# Allegro board private.brd
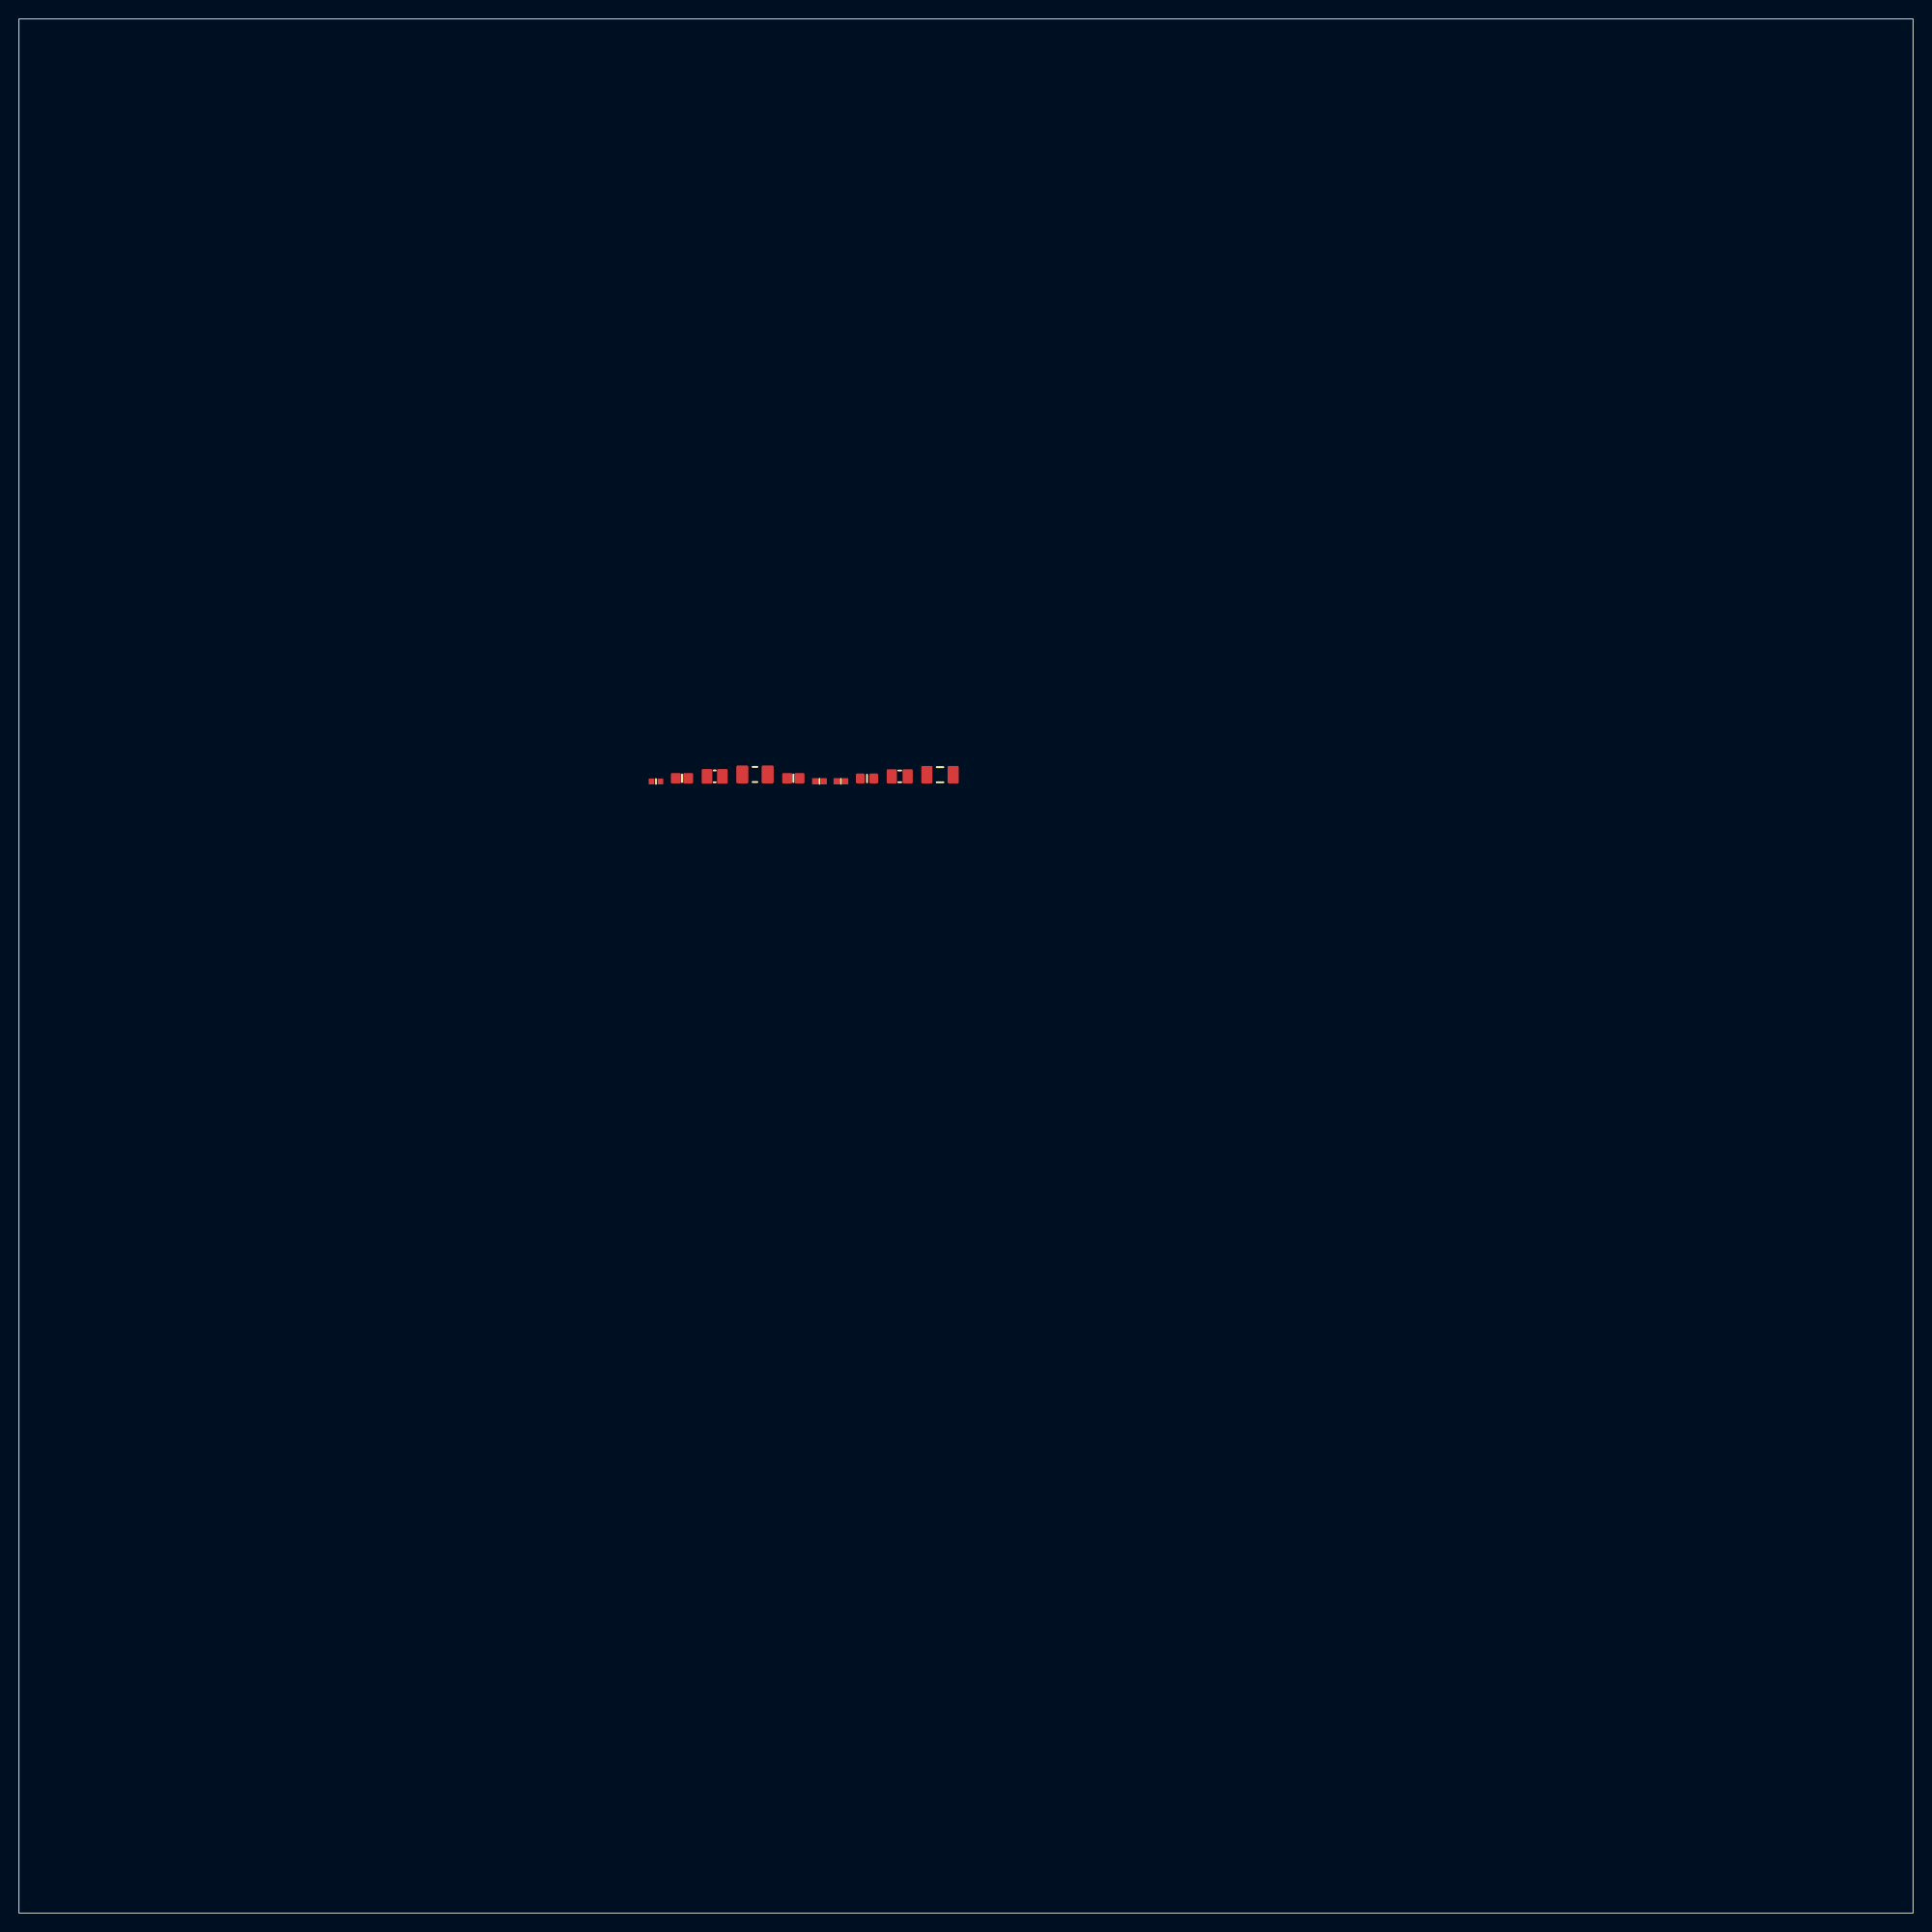
[diagram p0: board, top side]
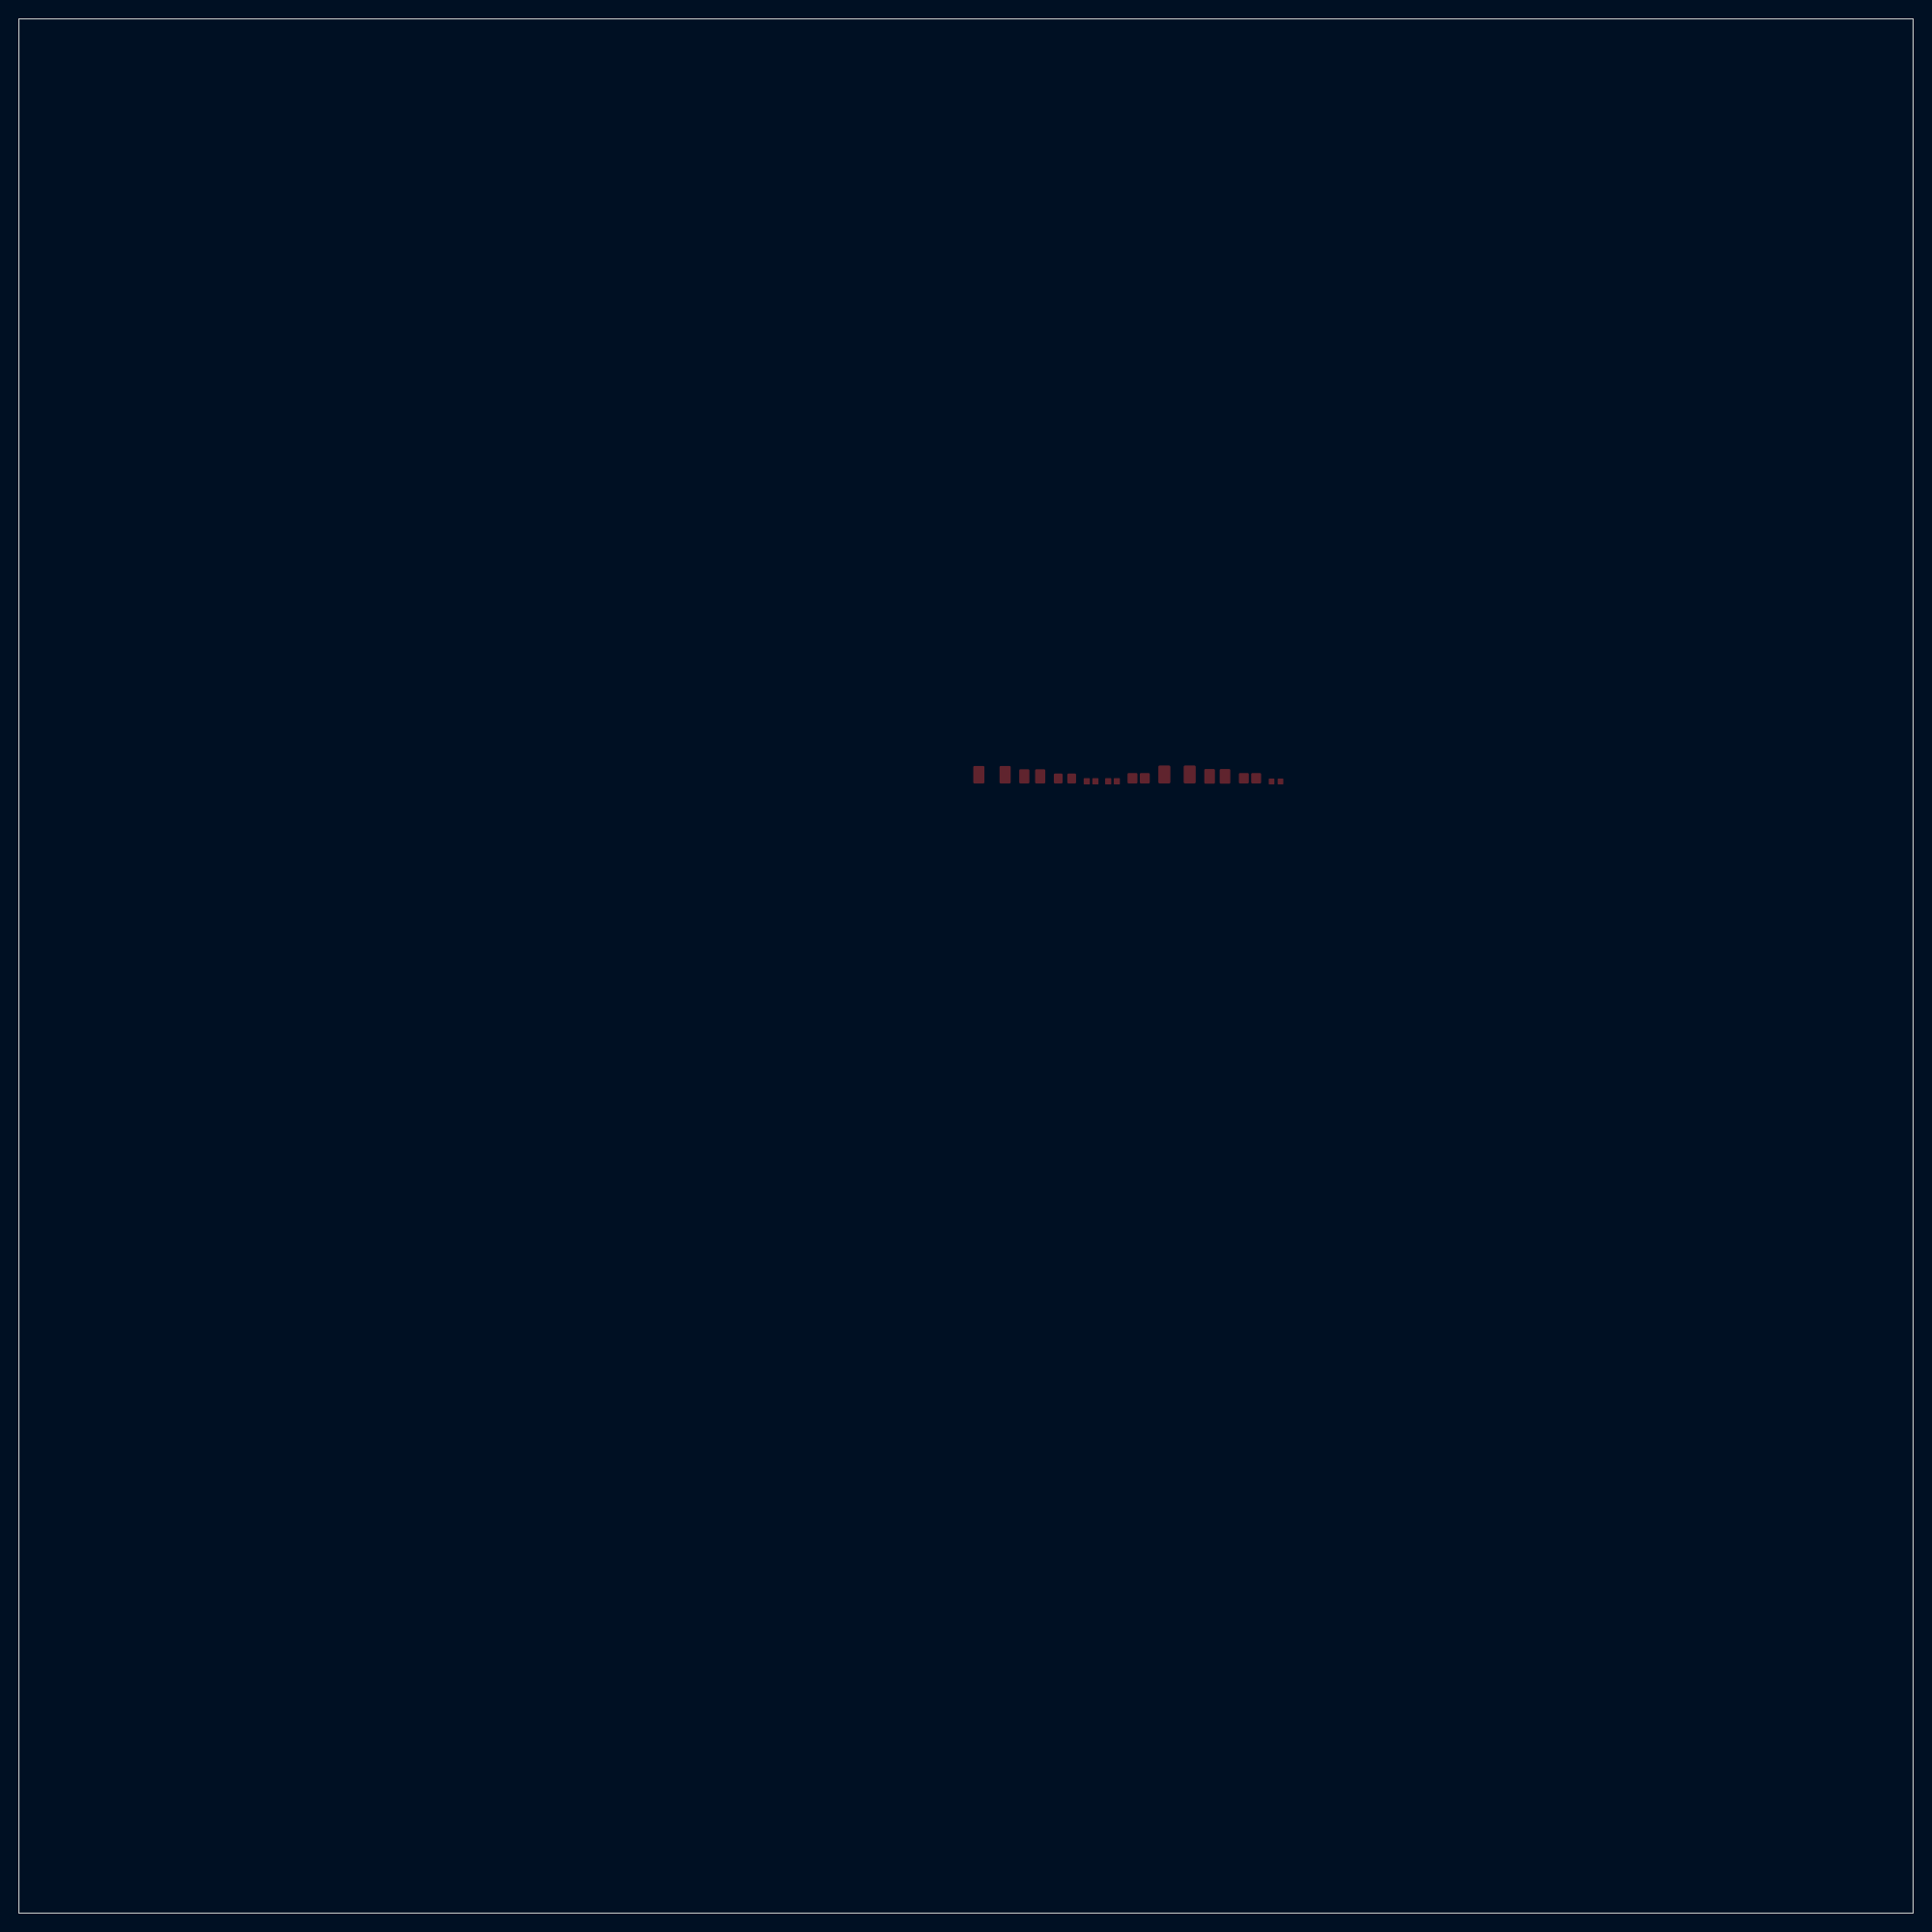
[diagram p1: board, bottom side, seen from below]

Outline 200 x 200 mm; copper layers: TOP, BOTTOM. Coordinates in mm from the lower left corner of the outline.
Outline path: rectangle 0,0 200,200

## Design rules (mm)
constraint set DEFAULT: min track width 0.127

## Placement (name value [footprint] x y rotation side)
C1  100nF,25V  [CAPC1005X70N]  67.26 119.48 0 top
C2  100nF,50V  [CAPC1608X100N]  70.01 119.82 0 top
C3  10uF,25V  [CAPC2012X140N]  73.46 120.02 0 top
C4  22uF,25V  [CAPC3216X140N]  77.72 120.22 0 top
C5  4.7uF,16V  [CAPC1608X100N]  81.77 119.82 0 top
R2  R,5%  [RESC1005X40N]  84.53 119.5 0 top
R3  0R,5%  [RESC1005X40N]  86.79 119.5 0 top
R4  0R,5%  [RESC1608X55N]  89.55 119.8 0 top
R5  0R,5%  [RESC2013X65N]  93 120.02 0 top
R6  0R,5%  [RESC3216X65N]  97.26 120.2 0 top

## Library data of the parts
C1 = CAP_100nF_25V_X5R_0402
C2 = CAP_100nF_50V_X5R_0603
C3 = CAP_10uF_25V_X5R_0805
C4 = CAP_22uF_25V_X5R_1206
C5 = CAP_4.7uF_16V_X5R_0603
R2 = RES_R_5%_0402
R3 = RES_0R_5%_0402
R4 = RES_0R_5%_0603
R5 = RES_0R_5%_0805
R6 = RES_0R_5%_1206

## Footprints (pads in the part's own frame, mm; a bottom-side part is the same pattern mirrored in y, then rotated)
CAPC1005X70N
  rrect 0.595x0.62 smd: 1(-0.472,0) 2(0.472,0)
CAPC1608X100N
  rrect 1.05x1.1 smd: 1(-0.65,0) 2(0.65,0)
CAPC2012X140N
  rrect 1.125x1.55 smd: 1(-0.812,0) 2(0.812,0)
CAPC3216X140N
  rrect 1.275x1.9 smd: 1(-1.337,0) 2(1.337,0)
RESC1005X40N
  rrect 0.65x0.66 smd: 1(-0.455,0) 2(0.455,0)
RESC1608X55N
  rrect 0.925x1.05 smd: 1(-0.713,0) 2(0.713,0)
RESC2013X65N
  rrect 1.075x1.5 smd: 1(-0.838,0) 2(0.838,0)
RESC3216X65N
  rrect 1.175x1.85 smd: 1(-1.387,0) 2(1.387,0)

## Nets
GND: C1.2 C2.2 C3.2 C4.2 C5.2 R2.2 R3.2 R4.2 R5.2 R6.2
VCC_BAR: C1.1 C2.1 C3.1 C4.1 C5.1 R2.1 R3.1 R4.1 R5.1 R6.1
